# Altium PCB SixAxIMU_XSens.PcbDoc
Units mm, origin at the board's own origin, x right, y up, seen from the top; angles counter-clockwise.
Board outline 30 x 35 mm, 2 copper layers (Top Layer, Bottom Layer); 22 components, 17 nets, 87 pads, 8 vias.
Unrouted connection lines stored in the file: 43.
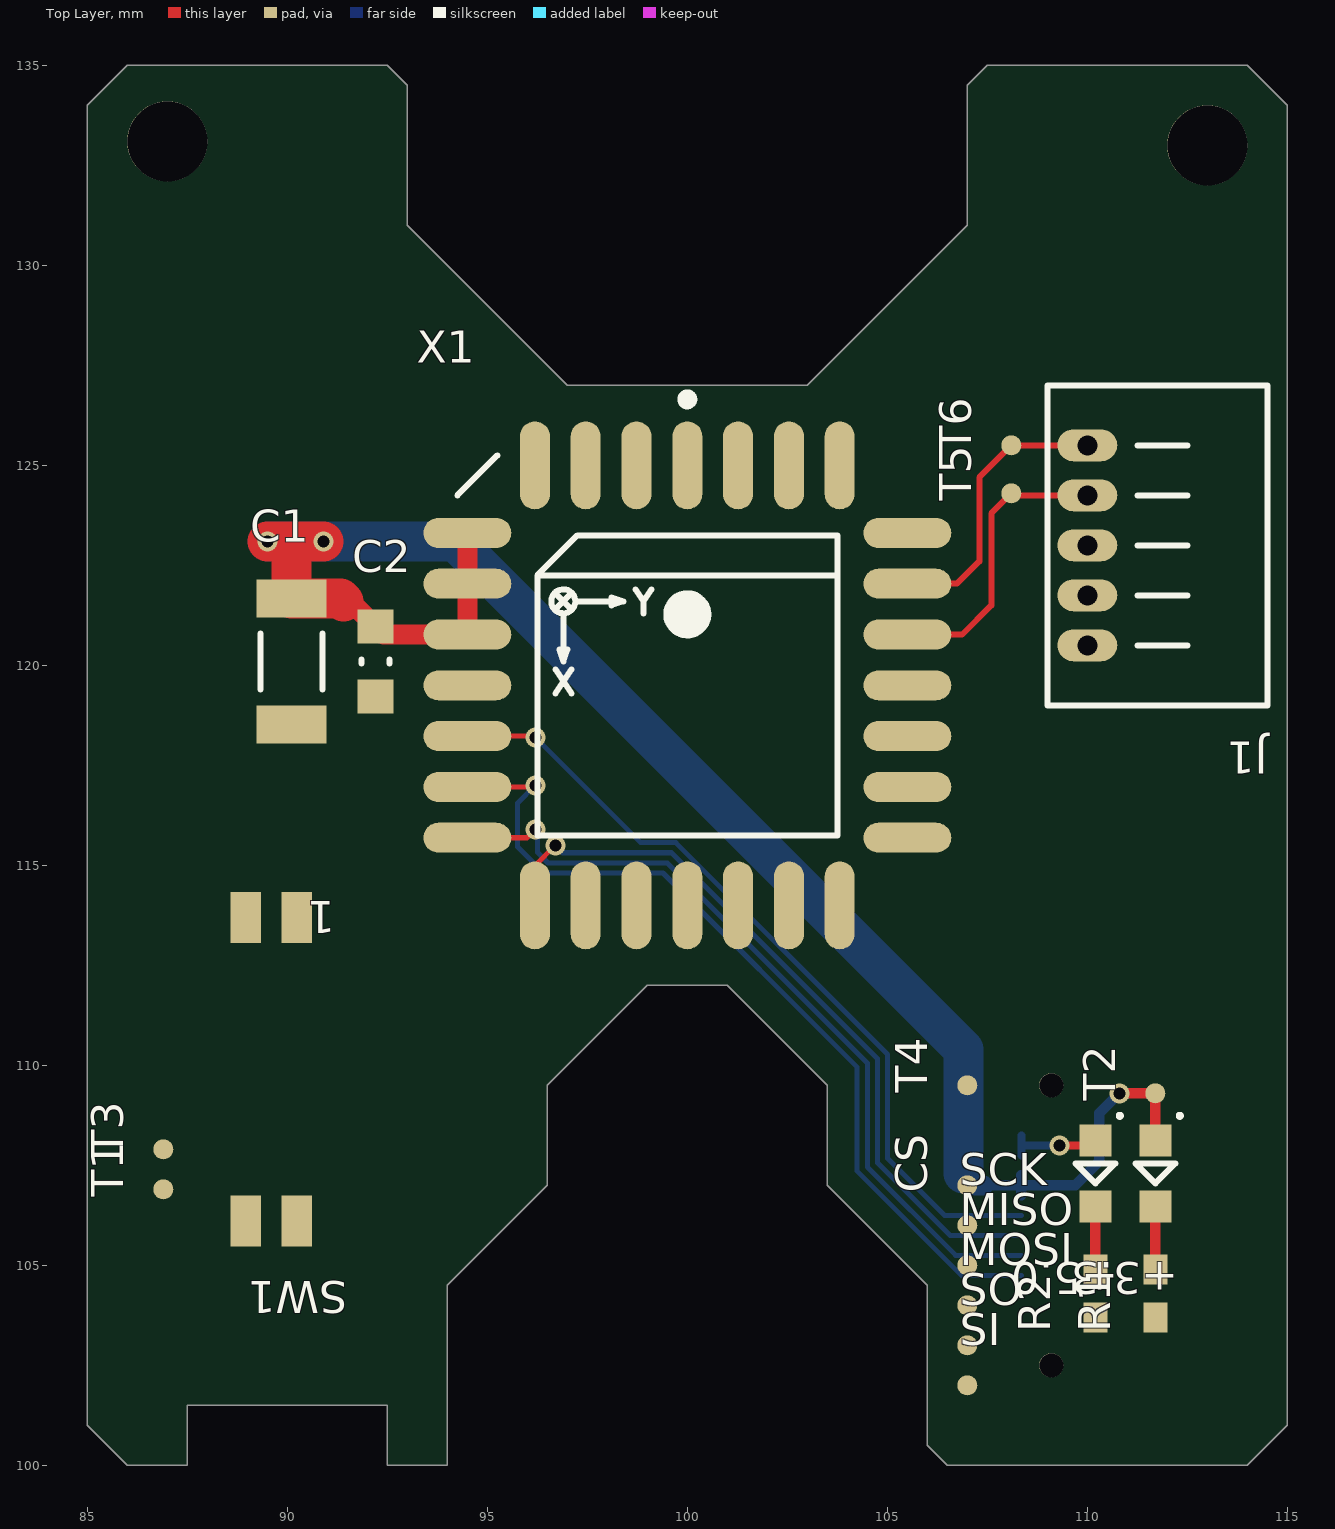
[diagram p0: Top Layer view]
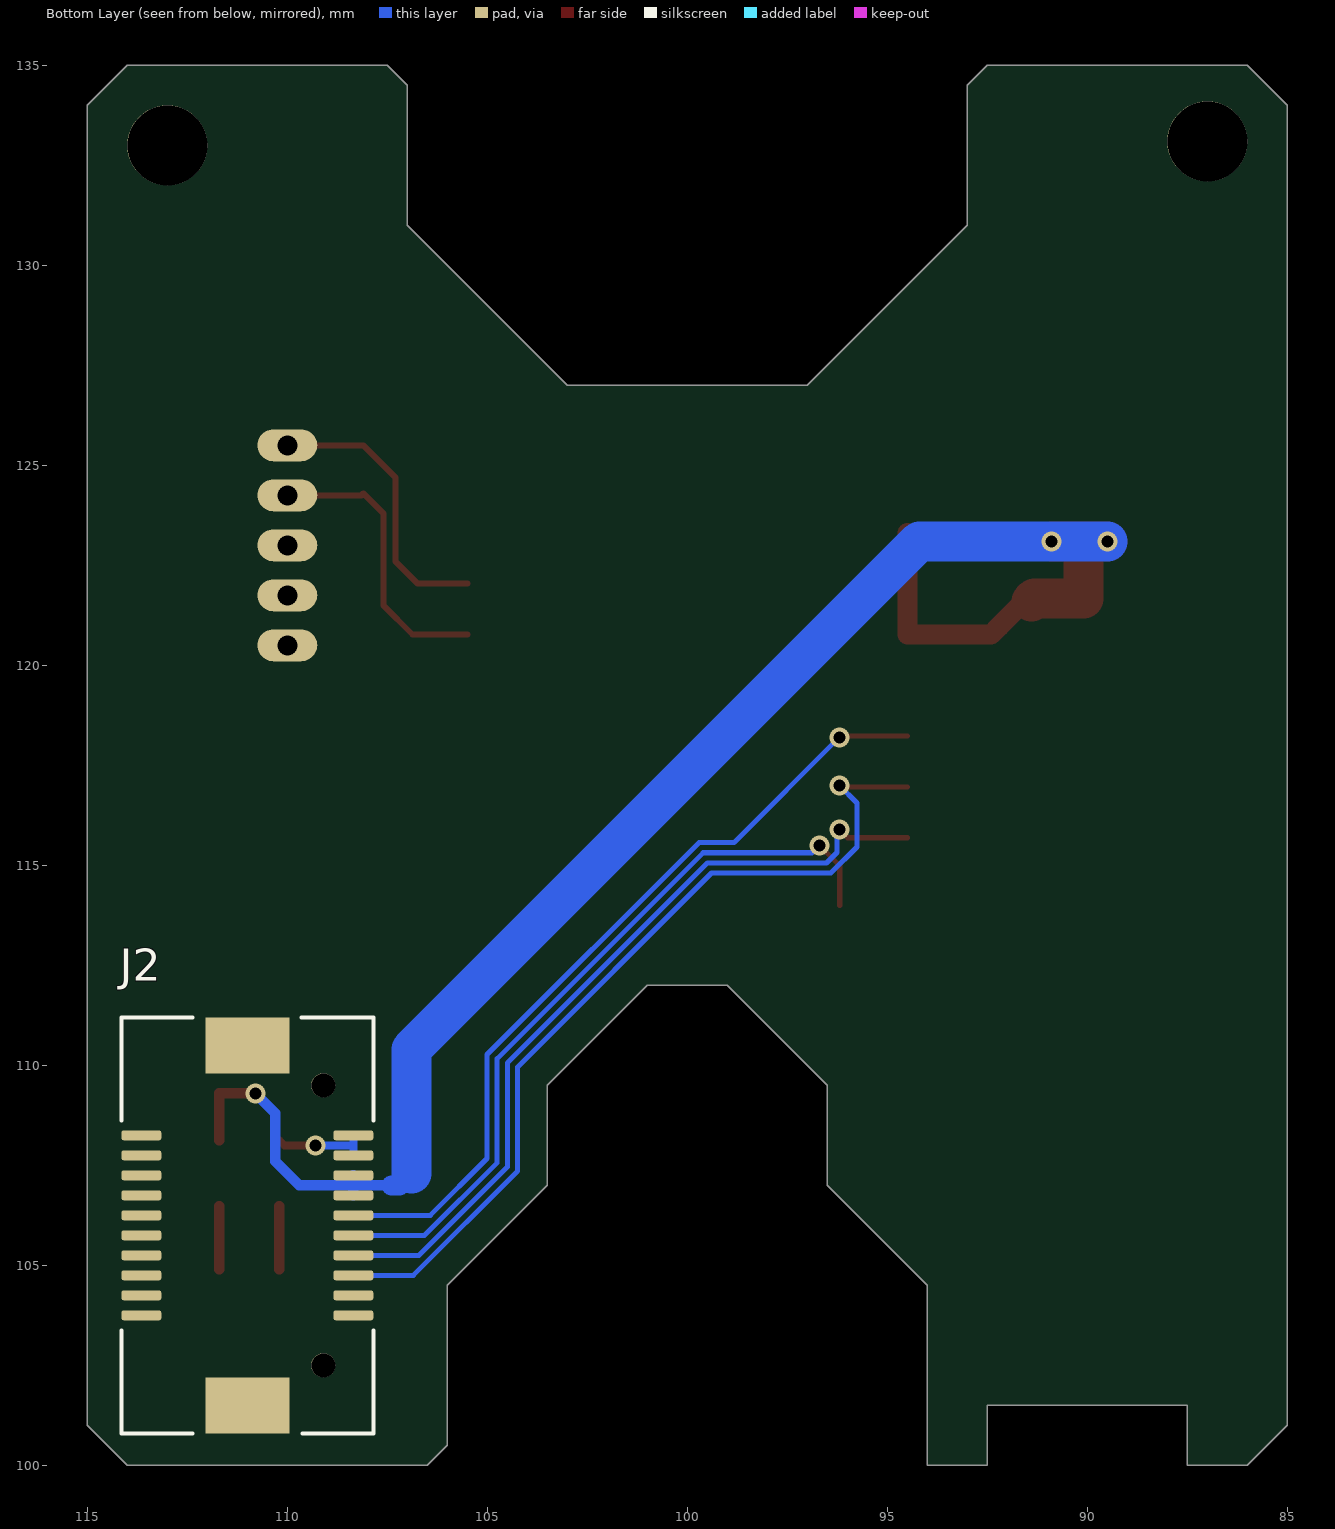
[diagram p1: Bottom Layer view, seen from below]

## Layer stack, top to bottom
Top Solder: solder mask 0.0102, Solder Resist, Dk 3.5
Top Layer: signal copper 0.0356
Dielectric 1: dielectric 0.32, FR-4, Dk 4.8
Bottom Layer: signal copper 0.0356
Bottom Solder: solder mask 0.0102, Solder Resist, Dk 3.5

## Board outline
92.5,101.5 87.5,101.5 87.5,100 86,100 85,101 85,134 86,135 92.5,135 93,134.5 93,131 97,127 103,127 107,131 107,134.5 107.5,135 114,135 115,134 115,101 114,100 106.5,100 106,100.5 106,104.5 103.5,107 103.5,109.5 101,112 99,112 96.5,109.5 96.5,107 94,104.5 94,100 92.5,100 92.5,101.5

## Design rules (kind name [scope] priority, off if disabled: settings)
Clearance Clearance_2 [InNamedPolygon('GND_L02_P006')] p1: gap=0.35
Clearance Clearance_1 [InNamedPolygon('+3.3_L03_P010')] p2: gap=0.35
Clearance [All] p3: gap=0.127
HoleSize [All] p1: absolutevalues=TRUE maxlimit=3 minlimit=0.2 maxpercent=80.000 minpercent=20.000
MinimumSolderMaskSliver [All] p1: minsoldermaskwidth=0.127
PlaneClearance [All] p1: clearance=0.5
PlaneConnect [All] p1: planeconnectstyle=Relief reliefexpansion=0.5 reliefentries=4 reliefconductorwidth=0.25 reliefairgap=0.25
PolygonConnect PolygonConnect_2 [All vs IsNamedPolygon('GND_RF_L01_P004')] p1: connectstyle=Direct reliefconductorwidth=0.254 reliefentries=4 polygonreliefangle="90 Angle" airgapwidth=0.254
PolygonConnect PolygonConnect_1 [All vs IsNamedPolygon('GND_RF_L04_P002')] p2: connectstyle=Direct reliefconductorwidth=0.254 reliefentries=4 polygonreliefangle="90 Angle" airgapwidth=0.254
PolygonConnect [All] p3: connectstyle=Relief reliefconductorwidth=0.25 reliefentries=4 polygonreliefangle="90 Angle" airgapwidth=0.25
RoutingCorners [All] p1: cornerstyle=45-Degree minsetback=2 maxsetback=2
RoutingVias [All] p1: holewidth=0.3 width=0.5 viastyle="Through Hole" minholewidth=0.2 minwidth=0.5 maxholewidth=0.5 maxwidth=0.7
SilkToSilkClearance [All] p1: silktosilkclearance=0.127
SilkToSolderMaskClearance [IsPad] p1: minsilkscreentomaskgap=0.127 clearancetoexposedcopper=TRUE
SolderMaskExpansion [All] p1: expansion=0.1
Width Width_POWERS [InNetClass('POWERS')] p1: maxlimit=1 minlimit=0.15 preferedwidth=0.5
Width [All] p2: maxlimit=0.3 minlimit=0.127 preferedwidth=0.15
23 further rules are at their usual default settings.

## Classes and differential pairs
net class POWERS: +3.3 +5.0 GND

## Components (designator, comment, footprint, x,y, rotation, side; value= is the part's Value field where it differs from the comment)
+3.3 "Red" "LED 0603" 111.7,107.3 r270 top
+5.0 "Red" "LED 0603" 110.2,107.3 r270 top
C1 "CL31A107MQHNNNE" "CAP 1206" 90.1,120.1 r90 top
C2 "CL10A105KA8NNNC" "CAP 0603" 92.2,120.1 r90 top
CS "TEST" "TEST_0.5mm, SMD" 107,107 r90 top
J1 "53048-0510" "PicoBlade, 53048-0510" 110,123 r270 top
J2 "DF17(2.0)-20DP-0.5V(57)" DF17(2.0)-20DP-0.5V(57) 111,106 r90 bottom
MISO "TEST" "TEST_0.5mm, SMD" 107,105 r90 top
MOSI "TEST" "TEST_0.5mm, SMD" 107,104 r90 top
R1 "P311-1.00KLRTR-ND" "RES 0402" 111.7,104.3 r90 top
R2 "P311-1.00KLRTR-ND" "RES 0402" 110.2,104.3 r90 top
SCK "TEST" "TEST_0.5mm, SMD" 107,106 r90 top
SI "TEST" "TEST_0.5mm, SMD" 107,102 r0 top
SO "TEST" "TEST_0.5mm, SMD" 107,103 r0 top
SW1 "GDH02STR04" GDH02STR04 89.6,109.9 r180 top
T1 "TEST" "TEST_0.5mm, SMD" 86.9,106.9 r90 top
T2 "TEST" "TEST_0.5mm, SMD" 111.7,109.3 r90 top
T3 "TEST" "TEST_0.5mm, SMD" 86.9,107.9 r90 top
T4 "TEST" "TEST_0.5mm, SMD" 107,109.5 r90 top
T5 "TEST" "TEST_0.5mm, SMD" 108.1,124.3 r90 top
T6 "TEST" "TEST_0.5mm, SMD" 108.1,125.5 r90 top
X1 "MTi-1" "PLCC28 - XSens MTi-1 Special" 100,119.5 r0 top

## Footprints (in the part's own frame and the unit in brackets; to place one, negate y for a bottom-side part, rotate by r counter-clockwise, add the part's x,y. Pads: shape width x height; smd on the part's side, far side on the other; paste and mask are expansions set on the pad)
"CAP 0603" [mm] "Chip Capacitor, 2-Leads, Body 1.60x0.80mm, IPC Medium Density"
  rect 0.85x0.9 smd: 1(-0.875,0) 2(0.875,0)
  silkscreen extent -0.05,-0.35 0.05,0.35, body extent -0.8,-0.4 0.8,0.4, height 0.8
"CAP 1206" [mm] "Chip Capacitor, 2-Leads, Body 3.20x1.60mm, IPC Medium Density"
  rect 0.95x1.75 smd: 1(-1.575,0) 2(1.575,0)
  silkscreen extent -0.7,-0.77 0.7,0.77, body extent -1.6,-0.8 1.6,0.8, height 1.6
DF17(2.0)-20DP-0.5V(57) [mm] "B2B, 20 POS HDR"
  rrect50% 0.25x1 smd: 1(-2.25,-2.65) 2(-1.75,-2.65) 3(-1.25,-2.65) 4(-0.75,-2.65) 5(-0.25,-2.65) 6(0.25,-2.65) 7(0.75,-2.65) 8(1.25,-2.65) 9(1.75,-2.65) 10(2.25,-2.65) 11(2.25,2.65) 12(1.75,2.65) 13(1.25,2.65) 14(0.75,2.65) 15(0.25,2.65) 16(-0.25,2.65) 17(-0.75,2.65) 18(-1.25,2.65) 19(-1.75,2.65) 20(-2.25,2.65)
  round 0.6 hole 0.6 unplated: 25(-3.5,-1.9) 26(3.5,-1.9)
  rect 1.4x2.1 smd: S0(-4.5,0) S1(4.5,0)
  silkscreen extent -5.2,-3.15 5.2,3.15, body extent -5,-2.85 5,2.85, height 4.26
GDH02STR04 [mm] "DIP Switch, 2 POS, SMD"
  rect 0.76x1.27 smd: 1(-0.635,-3.795) 2(-0.635,3.795) 3(0.635,-3.795) 4(0.635,3.795)
  body extent -1.8,-3.1 1.8,3.1, height 2.31
"LED 0603" [mm] "Chip LED, 2-Leads, Body 1.60x0.80mm, IPC Medium Density"
  rect 0.8x0.8 smd: A(-0.825,0) K(0.825,0)
  silkscreen extent -1.49,-0.5 0.25,0.66, body extent -0.8,-0.4 0.8,0.4, height 0.75
"PicoBlade, 53048-0510" [mm] "PicoBlade, Header, R/A, PTH, 5 Pos, 1.25mm Pitch"
  oval 0.8x1.5 hole 0.5: 1(2.5,0) 2(1.25,0) 3(0,0) 4(-1.25,0) 5(-2.5,0)
  silkscreen extent -4,-1 4,4.5, body extent -4,-1.05 4,4.45, height 3.51
"PLCC28 - XSens MTi-1 Special" [mm] "Leaded Chip Carrier, 28-Leads, Body 12.45x12.45mm, Pitch 1.270mm, IPC Medium Density"
  oval 0.75x2.2 smd: 1(0,5.5) 2(-1.27,5.5) 3(-2.54,5.5) 4(-3.81,5.5) 12(-3.81,-5.5) 13(-2.54,-5.5) 14(-1.27,-5.5) 15(0,-5.5) 16(1.27,-5.5) 17(2.54,-5.5) 18(3.81,-5.5) 26(3.81,5.5) 27(2.54,5.5) 28(1.27,5.5)
  oval 2.2x0.75 smd: 5(-5.5,3.81) 6(-5.5,2.54) 7(-5.5,1.27) 8(-5.5,0) 9(-5.5,-1.27) 10(-5.5,-2.54) 11(-5.5,-3.81) 19(5.5,-3.81) 20(5.5,-2.54) 21(5.5,-1.27) 22(5.5,0) 23(5.5,1.27) 24(5.5,2.54) 25(5.5,3.81)
  silkscreen extent -5.75,-3.75 3.75,7.27, body extent -6.05,-5.95 6.05,5.95, height 2.6
"RES 0402" [mm] "Chip Resistor, 2-Leads, Body 1.00x0.50mm, IPC Medium Density"
  rect 0.75x0.6 smd: 1(-0.6,0) 2(0.6,0)
  body extent -0.5,-0.25 0.5,0.25, height 0.35
"TEST_0.5mm, SMD" [mm]
  round 0.5 smd: 0(0,0)

## Part data
+3.3 +5.0: library part 1608SURC-06, "LED, Red, 0603"
C1: "MLCC, 100uF, 1206, 20%, 6.3V, X5R"
C2: "MLCC, 1uF, 0603, 10%, 25V, X5R"
J1: "PicoBlade, Header, R/A, PTH, 5 Pos, 1.25mm Pitch"
J2: "Conn, B2B, 20 Pos, HEADER"
R1 R2: "RES, 0402, 1k, 1%"
SW1: "DIP Switch, 2 POS, SMD"
X1: "XSens MTi-1 Series"

## Free pads (board coordinates)
  round 2 hole 2 unplated: HOLE(87,133.1) HOLE(113,133)

## Via types
v1: diameter 0.5, hole 0.3, Top Layer to Bottom Layer, tented both sides, 8 vias

## Nets (pads, with @x,y where several pads share a name; then routed paths per layer and width w, separated by ;. In a path a pad name is that pad's centre, name@x,y a point inside that pad or via, vN(x,y) a via of type N, cw(c..) or ccw(c..) an arc to the next point about the centre after c; other vN are vias at no path point)
+3.3: +3.3.A C1.2 C2.2 J1.3 J2.7 J2.8 T2.0 X1.5 X1.6 X1.7 | length 44.3
  Top Layer w0.254: v1(110.8,109.3) T2.0 +3.3.A
  Top Layer w0.5: 91.325,121.675 91.5,121.675 C2.2 92.405,120.77 X1.7 X1.6 X1.5
  Top Layer w1: v1(89.5,123.1) 90.1,123.1 ; v1(90.9,123.1) 90.1,123.1 ; 91.4,121.6 91.325,121.675 C1.2 90.1,123.1
  Bottom Layer w0.254: 107.4,107 108.35,107 ; J2.7 108.35,107 ; J2.8 108.35,107 ; v1(110.8,109.3) 110.3,108.8 110.3,107.6 109.7,107 108.35,107
  Bottom Layer w0.5: 106.9,107.3 107.2,107 107.4,107
  Bottom Layer w1: v1(89.5,123.1) v1(90.9,123.1) 94.2,123.1 106.9,110.4 106.9,107.3
+5.0: +5.0.A J2.9 J2.10 | length 2.4
  Top Layer w0.2: v1(109.3,108) 110.075,108 +5.0.A
  Bottom Layer w0.2: J2.9 108.35,108 ; J2.10 108.35,108 ; v1(109.3,108) 108.35,108
"DE/CTS (DNC)": T4.0 X1.21
GND: C1.1 C2.1 J1.1 J2.11 J2.12 J2.13 J2.14 J2.15 J2.16 J2.17 J2.18 J2.19 J2.20 R1.1 R2.1 SW1.1 SW1.3 X1.4 X1.8 X1.13 X1.25
Net+3.3_K: +3.3.K R1.2 | length 1.6
  Top Layer w0.254: R1.2 +3.3.K
Net+5.0_K: +5.0.K R2.2 | length 1.6
  Top Layer w0.254: R2.2 +5.0.K
NetX1_1: X1.1 X1.2 X1.3 X1.17 X1.18 X1.19 X1.20 X1.26 X1.27 X1.28
PSEL0: SW1.2 T1.0 X1.14
PSEL1: SW1.4 T3.0 X1.15
SPI1_MISO: J2.4 MISO.0 X1.11 | length 20.2
  Top Layer w0.127: X1.11 95.99,115.69 v1(96.2,115.9)
  Bottom Layer w0.127: v1(96.2,115.9) 96.26,115.84 96.26,115.318 96.518,115.06 99.5,115.06 104.5,110.059 104.5,107.459 106.709,105.25 J2.4
SPI1_MOSI: J2.3 MOSI.0 X1.10 | length 22
  Top Layer w0.127: X1.10 96.16,116.96 v1(96.2,117)
  Bottom Layer w0.127: v1(96.2,117) 95.76,116.56 95.76,115.458 96.412,114.806 99.394,114.806 104.246,109.954 104.246,107.354 106.85,104.75 J2.3
SPI1_NSS: CS.0 J2.6 X1.9 | length 20.3
  Top Layer w0.127: X1.9 96.17,118.23 v1(96.2,118.2)
  Bottom Layer w0.127: v1(96.2,118.2) 98.832,115.568 99.71,115.568 105.008,110.27 105.008,107.67 106.428,106.25 J2.6
SPI1_SCK: J2.5 SCK.0 X1.12 | length 18.9
  Top Layer w0.127: X1.12 96.19,114.99 v1(96.7,115.5)
  Bottom Layer w0.127: v1(96.7,115.5) 96.886,115.314 99.605,115.314 104.754,110.164 104.754,107.564 106.568,105.75 J2.5
SYNC_IN: J2.1 SI.0 X1.16
SYNC_OUT: J2.2 SO.0 X1.22
UART_RX: J1.4 T5.0 X1.23 | length 7.3
  Top Layer w0.15: X1.23 106.87,120.77 107.6,121.5 107.6,123.8 T5.0 108.15,124.25 J1.4
UART_TX: J1.5 T6.0 X1.24 | length 7.2
  Top Layer w0.15: X1.24 106.74,122.04 107.3,122.6 107.3,124.7 T6.0 J1.5
pads on no net: J1.2 J2.25 J2.26 J2.S0 J2.S1

## Silkscreen, mask and mechanical layers (free items; w line width, h text height)
Mechanical 1:
  the board outline again, w0.1
Mechanical 28:
  circle w0.15: c100,133.8 r6.701
  lines w0.01: 70.5,100 120,100 120,125 ; 80,100 80,125 ; 85,100 85,122.5 ; 90,100 90,125 ; 95,100 95,122.5 ; 100,105 122.5,105 ; 100,110 125,110 ; 100,115 122.5,115 ; 100,120 125,120 ; 100,130 125,130 ; 100,135 122.5,135 ; 100,140 125,140 ; 100,149.5 100,100 ; 105,100 105,122.5 ; 110,100 110,125 ; 115,100 115,122.5 ; 122.5,125 100,125 100,100 ; 125,100 100,100
  lines w0.1: 87,127.5 88,127.5 ; 87.5,127 87.5,128 ; 90.3,127.5 91.3,127.5 ; 90.8,127 90.8,128 ; 85.5,104.3 85.5,110.1 93.9,110.1 93.9,104.3 85.5,104.3 ; 94.5,96 94.5,100 94.5,104.5 97,107 97,109.5 99.5,112 100.5,112 103,109.5 103,107 105.5,104.5 105.5,100 105.5,96 105,95.5 95,95.5 94.5,96
  lines w0.15: 110.5,106 111.5,106 ; 111,105.5 111,106.5 ; 85,101 86,100 87.3,100 87.3,101.6 87.4,101.7 92.4,101.7 92.5,101.6 92.5,100 114,100 115,101 115,134 114,135 86,135 85,134 85,101
  text "40mm" at 125,140 h0.8
  text "20mm" at 80,125 h0.8 r90
  text "10mm" at 90,125 h0.8 r90
  text "10mm" at 110,125 h0.8 r90
  text "20mm" at 120,125 h0.8 r90
  text "30mm" at 106.509,124.7 h0.8
  text "0mm" at 104.809,124.05 h0.8 r90
  text "20mm" at 106.509,114.7 h0.8
  text "10mm" at 125,110 h0.8
  text "0mm" at 125,100 h0.8

## Text inside footprints (layer, text, board x,y; h text height)
SW1: Top Overlay "1" at 91.2,114.1 h0.8 r180